# Altium PCB SmartCoin.PcbDoc
Units mm, origin at the board's own origin, x right, y up, seen from the top; angles counter-clockwise.
Board outline 28.59 x 29.14 mm, 4 copper layers (Top Layer 1, GND1, GND2, Bottom Layer 1), stack 1.586 mm thick; 38 components, 39 nets, 294 pads, 96 vias.
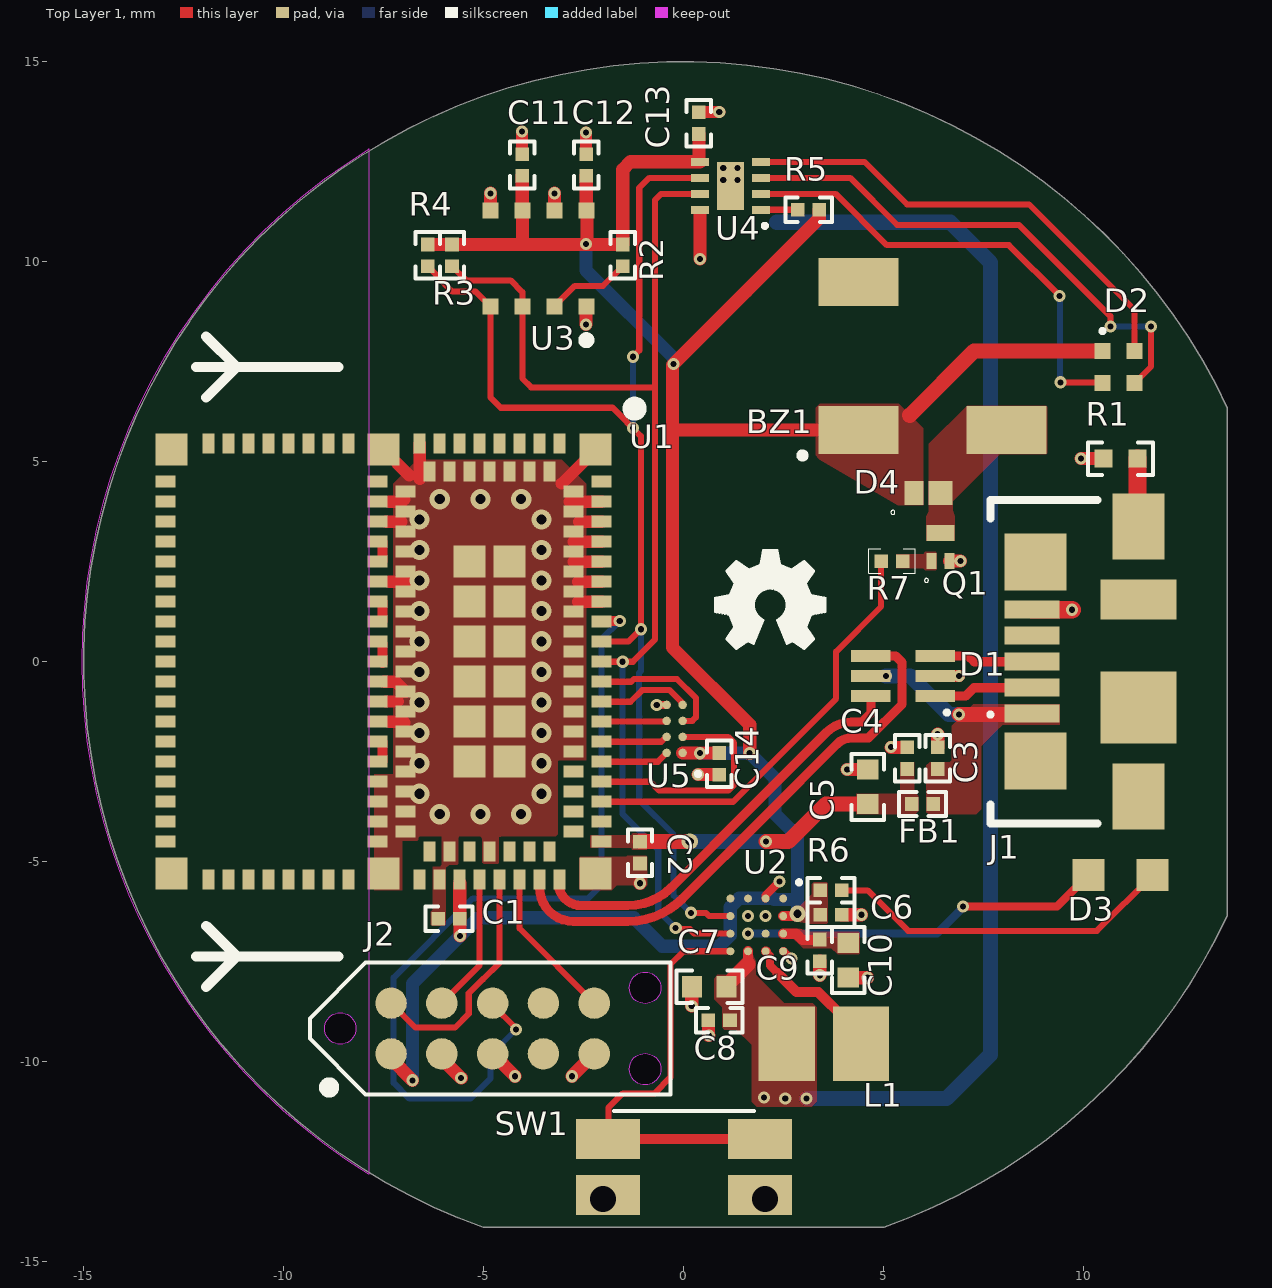
[diagram p0: Top Layer 1 view]
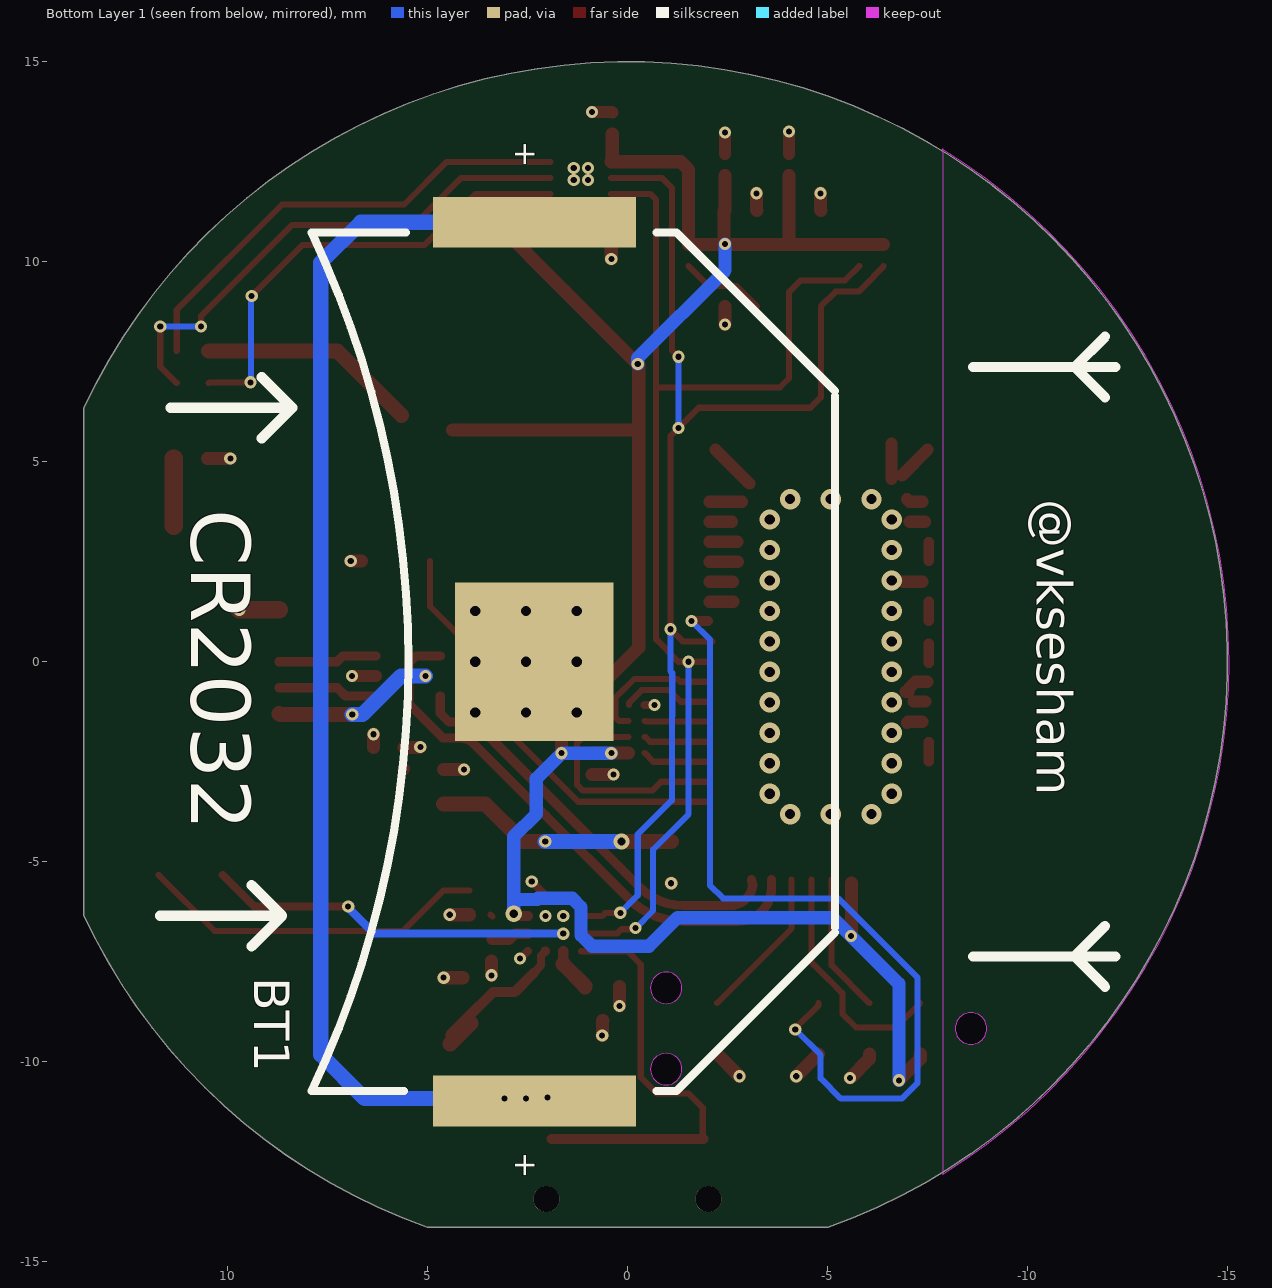
[diagram p1: Bottom Layer 1 view, seen from below]
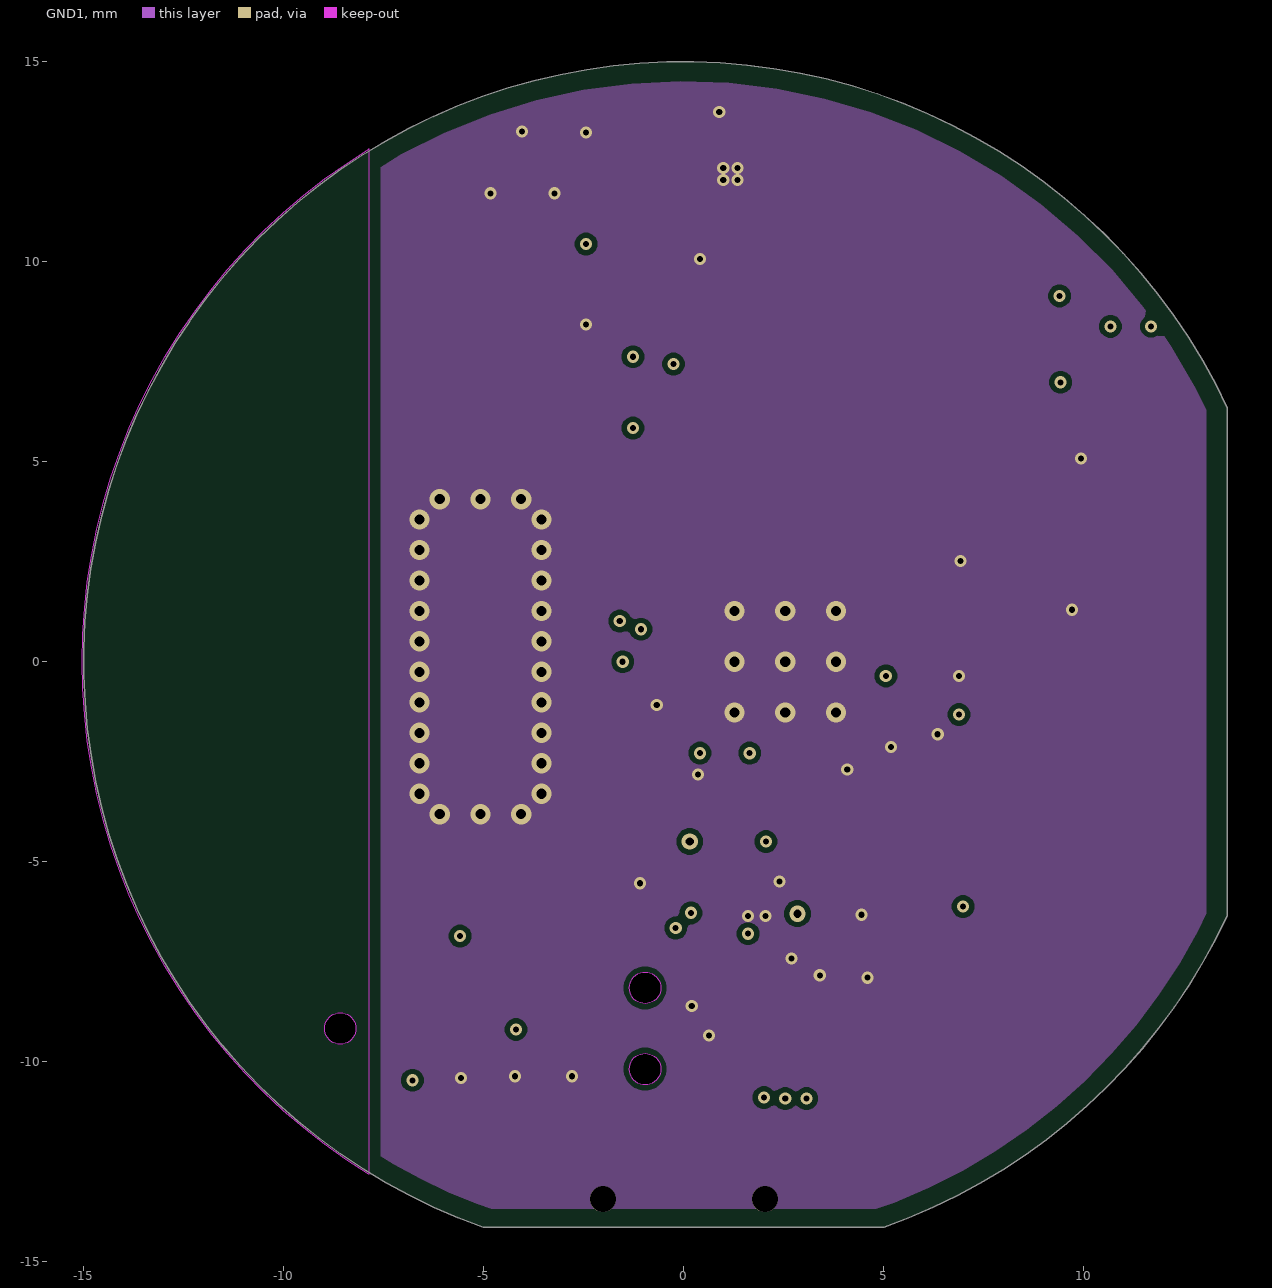
[diagram p2: GND1]
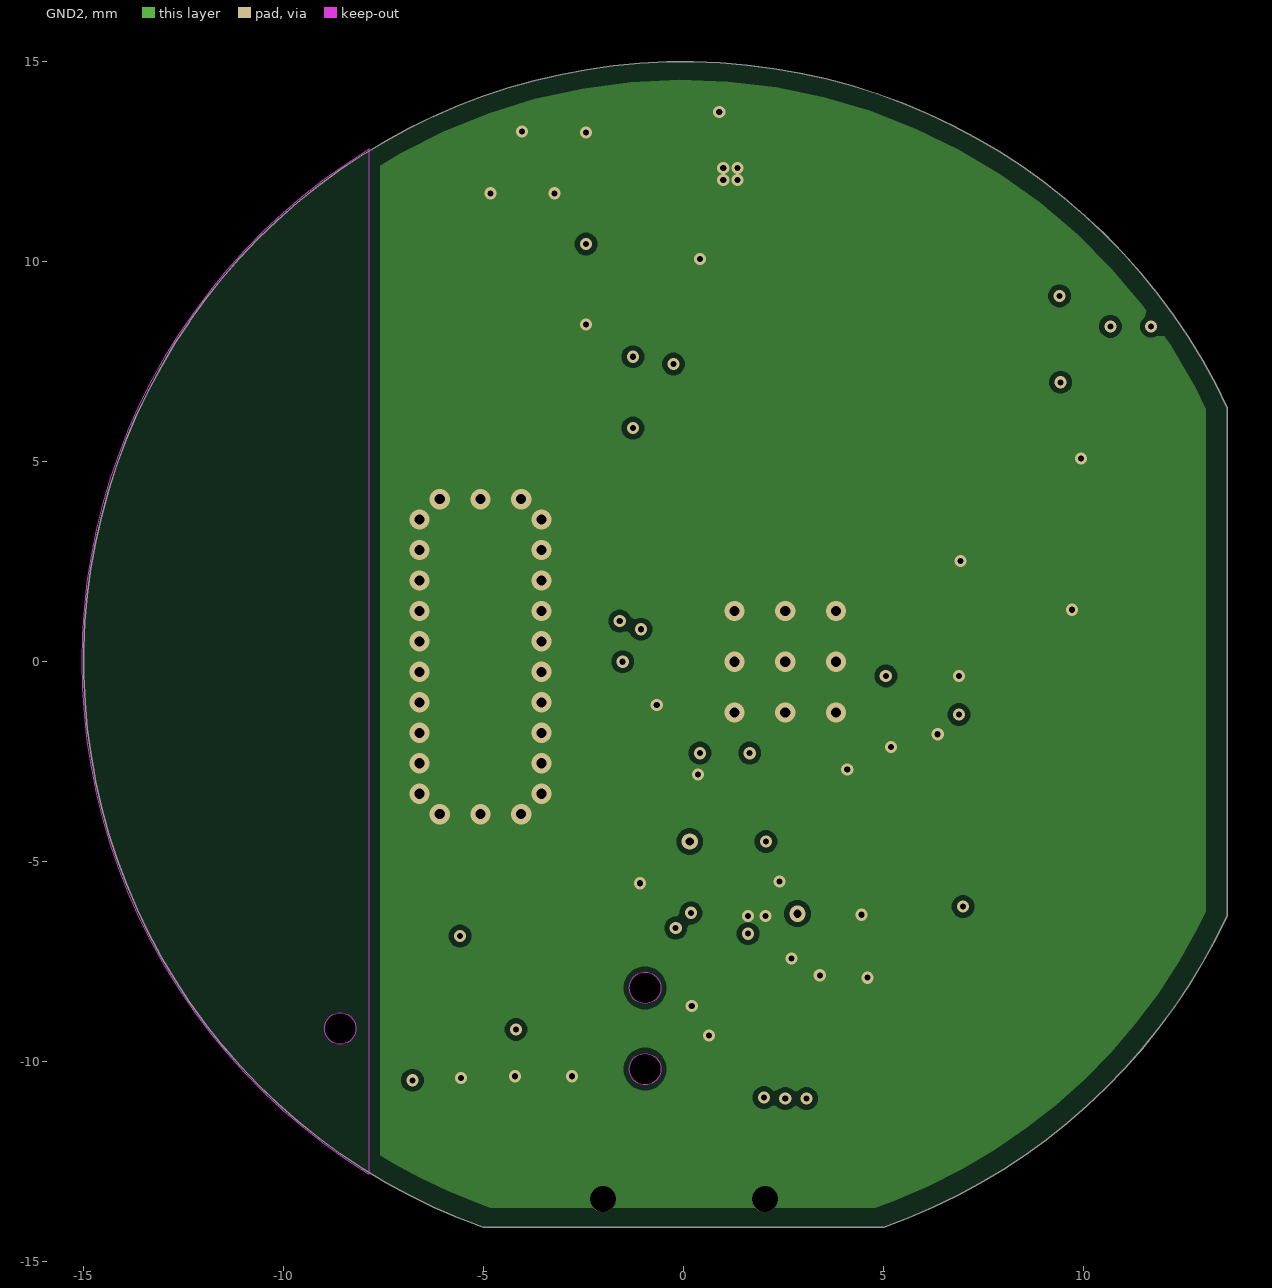
[diagram p3: GND2]
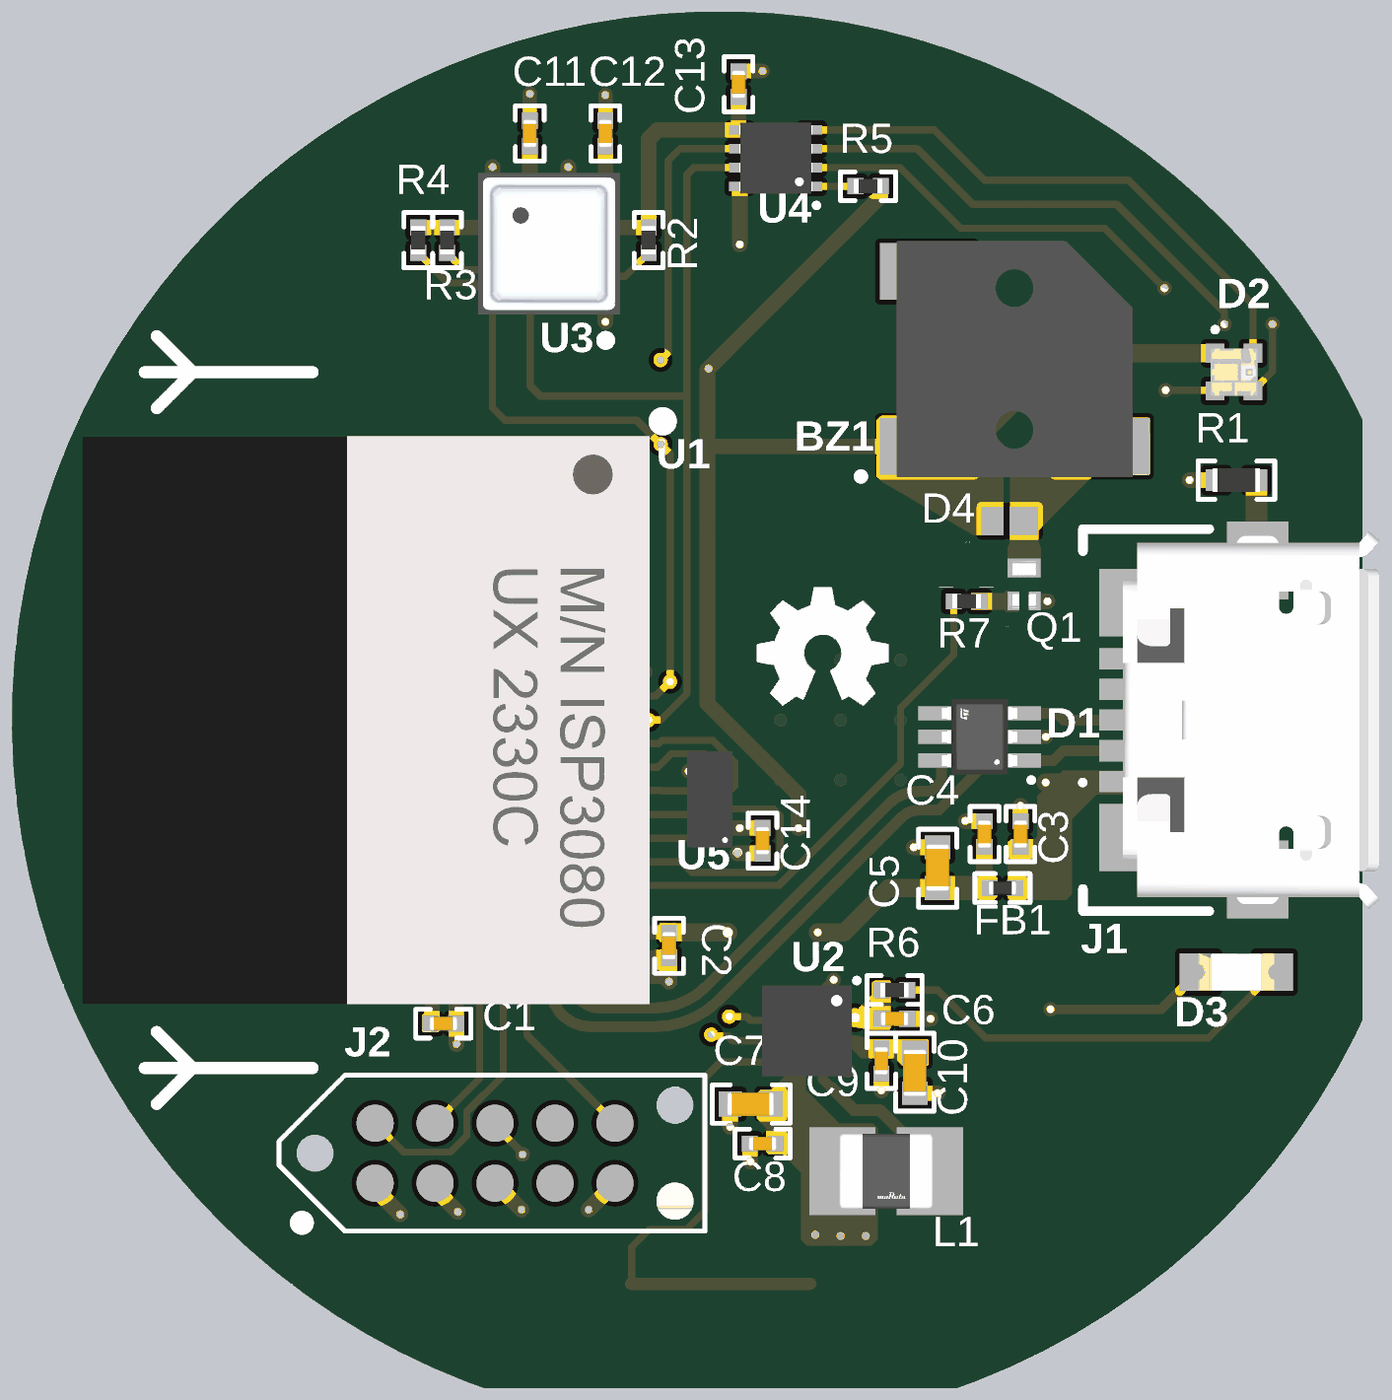
[diagram p4: 3D render of the assembled board from above, using the file's embedded part models]

## Layer stack, top to bottom
Top Solder: solder mask 0.0102, Solder Resist, Dk 3.5
Top Layer 1: signal copper 0.035
Dielectric 2: prepreg 0.2104, FR-4, Dk 4.4
GND1: signal copper 0.0152
Dielectric 1: dielectric 1.065, FR-4, Dk 4.6
GND2: signal copper 0.0152
Dielectric 3: prepreg 0.2104, FR-4, Dk 4.4
Bottom Layer 1: signal copper 0.035
Bottom Solder: solder mask 0.0102, Solder Resist, Dk 3.5

## Board outline
-5.01,-14.139 5.01,-14.139 ccw(c0,0) 13.595,-6.339 13.594,-6.339 13.594,6.339 13.595,6.339 ccw(c0,0)

## Design rules (kind name [scope] priority, off if disabled: settings)
Clearance Clearance_1 [All] p1: gap=0.127 ignorepadtopadclearanceinfootprint=FALSE
Clearance [(OnLayer('Keep-Out Layer')) vs HasFootprint('ISP3080-UX')] p2: gap=0 ignorepadtopadclearanceinfootprint=TRUE
ComponentClearance [All] p1: gap=0.254 collisioncheckmode=3 verticalgap=0.127 showdistances=FALSE
DiffPairsRouting [(InDifferentialPairClass('All Differential Pairs'))] p1: maxlimit=0.165 minlimit=0.165 mostfreqgap=0.165 toplayer_minwidth=0.23 toplayer_maxwidth=0.23 toplayer_prefwidth=0.23 midlayer1_minwidth=0.381 midlayer1_maxwidth=0.381 midlayer1_prefwidth=0.381 midlayer2_minwidth=0.381 midlayer2_maxwidth=0.381 midlayer2_prefwidth=0.381 bottomlayer_minwidth=0.23 bottomlayer_maxwidth=0.23 bottomlayer_prefwidth=0.23 impedanceprofiledriven=TRUE maxuncoupledlength=12.7
HoleSize [All] p1: absolutevalues=TRUE maxlimit=2.54 minlimit=0.152 maxpercent=80.000 minpercent=20.000
HoleToHoleClearance [All] p1: gap=0.152 allowstackedmicrovias=TRUE
MinimumSolderMaskSliver [HasFootprint('ISP3080-UX')] p1: minsoldermaskwidth=0
PolygonConnect [All] p1: connectstyle=Direct reliefconductorwidth=0.254 reliefentries=4 polygonreliefangle="90 Angle" airgapwidth=0.254
RoutingVias [All] p1: holewidth=0.254 width=0.508 viastyle="Through Hole" minholewidth=0.152 minwidth=0.305 maxholewidth=0.508 maxwidth=1.016
SilkToSilkClearance [All] p1: silktosilkclearance=0.15
SilkToSolderMaskClearance [IsPad] p1: minsilkscreentomaskgap=0.051 clearancetoexposedcopper=TRUE
SolderMaskExpansion [All] p1: expansion=0.102 istentingtop=FALSE
SupplyNets "Schematic Supply Nets_3" [InNet('3V')] p1: voltage=0.000
SupplyNets "Schematic Supply Nets_2" [InNet('VBUS')] p2: voltage=0.000
SupplyNets "Schematic Supply Nets" [InNet('GND')] p3: voltage=0.000
ViasUnderSMD [InBGA] p1: allowed=TRUE
Width [All] p1: maxlimit=0.508 minlimit=0.127 preferedwidth=0.152
23 further rules are at their usual default settings.

## Classes and differential pairs
component class Power: BT1 C6 C7 C8 C9 C10 D3 L1 R6 SW1 U2
component class MCU: C1 C2 U1
component class Peripherals: BZ1 C11 C12 C13 C14 D2 D4 Q1 R2 R3 R4 R5 R7 U3 U4 U5
component class Connectors: C3 C4 C5 D1 FB1 J1 J2 R1
differential pair USBD: +USBD_P -USBD_N
differential pair D: +D_P -D_N

## Components (designator, comment, footprint, x,y, rotation, side; value= is the part's Value field where it differs from the comment)
BT1 "3034" FP-3034-MFG 3,0 r90 bottom
BZ1 "Buzzer - CMT-0503-03-SMT-TR" "Buzzer - CMT-0503-03-SMT-TR" 6.223,7.645 r0 top locked
C1 "1uF" "Capacitor - 0201" -5.867,-6.426 r0 top
C2 "2u2F" "Capacitor - 0201" -1.092,-4.775 r90 top
C3 "1uF" "Capacitor - 0201" 6.35,-2.413 r270 top
C4 "1uF" "Capacitor - 0201" 5.588,-2.413 r270 top
C5 "10uF" "Capacitor - 0402" 4.597,-3.124 r270 top
C6 "2u2F" "Capacitor - 0201" 3.683,-6.325 r180 top
C7 "10uF" "Capacitor - 0402" 0.635,-8.128 r0 top
C8 "1nF" "Capacitor - 0201" 0.889,-8.966 r0 top
C9 "1nF" "Capacitor - 0201" 3.404,-7.214 r90 top
C10 "22uF" "Capacitor - 0402" 4.115,-7.468 r90 top
C11 "100nF" "Capacitor - 0201" -4.039,12.421 r270 top
C12 "100nF" "Capacitor - 0201" -2.438,12.421 r270 top
C13 "2u2F" "Capacitor - 0201" 0.381,13.462 r270 top
C14 "1uF" "Capacitor - 0201" 0.889,-2.553 r90 top
D1 "USBLC6-2P6" FP-SOT-666-MFG 5.486,-0.356 r180 top
D2 "150044M155260" WL-SFCC_0404_150044M155260 10.871,7.366 r270 top
D3 "150060VS75000" WL-SMCW_0603_150060xx75000 10.922,-5.334 r0 top
D4 "NSR05F40NXT5G" ONSC-DSN-2-152AC-01_V 6.121,4.216 r90 top
FB1 "BLM03AX100SZ1D" "Ferrite Beat - 0201" 5.969,-3.556 r180 top
J1 "473460001" FP-473460001-MFG 11.022,0 r90 top locked
J2 "TC2050-IDC" TC2050-IDC -4.775,-9.169 r0 top
L1 "LQM2MPN2R2MG0L" FP-LQM2MPN_G0-IPC_A 3.505,-9.55 r0 top
Q1 "DMN2300UFB4-7B" FP-X2-DFN1006-3-MFG 6.426,2.87 r90 top
R1 "0" "Resistor - 0402" 10.922,5.08 r0 top
R2 "1K" "Resistor - 0201" -1.524,10.16 r270 top
R3 "4.7K" "Resistor - 0201" -5.791,10.16 r90 top
R4 "4.7K" "Resistor - 0201" -6.401,10.16 r270 top
R5 "4.7K" "Resistor - 0201" 3.124,11.303 r180 top
R6 "100" "Resistor - 0201" 3.683,-5.715 r180 top
R7 "1K" "Resistor - 0201" 5.207,2.515 r0 top
SW1 "434331013822" 434331013822 1270.005,1257.315 r0 top
U1 "ISP3080-UX" ISP3080-UX -7.5,0 r270 top locked
U2 "nPM2100" npm2100 1.829,-6.579 r270 top locked
U3 "BME690" IC_BME688 -3.632,10.084 r270 top
U4 "KTD2026" KTD2026 1.168,11.897 r180 top
U5 "AT25EU0161A" AT25EU0161A -0.225,-1.68 r180 top locked

## Footprints (in the part's own frame and the unit in brackets; to place one, negate y for a bottom-side part, rotate by r counter-clockwise, add the part's x,y. Pads: shape width x height; smd on the part's side, far side on the other; paste and mask are expansions set on the pad)
434331013822 [mm] "WS-TASU 3.5x2.9 mm SMD side push"
  rect 1.6x1 smd: A1(-1271.9,-1269.25) A2(-1268.1,-1269.25) B1(-1271.9,-1270.65) B2(-1268.1,-1270.65)
  round 0.65 hole 0.65: B1(-1272.025,-1270.75) B2(-1267.975,-1270.75)
  silkscreen extent -1271.75,-1268.55 -1268.25,-1268.55, body extent -1272.35,-1272.1 -1267.65,-1268.55, height 1.35
AT25EU0161A [mm] "16-Mbit, Ultra-Low Energy Serial Flash Memory"
  round 0.21 smd: A1(-0.2,0.6) A2(0.2,0.6) B1(-0.2,0.2) B2(0.2,0.2) C1(-0.2,-0.2) C2(0.2,-0.2) D1(-0.2,-0.6) D2(0.2,-0.6)
  silkscreen extent -0.63,1.08 -0.54,1.17, body extent -0.48,-1.02 0.48,1.02, height 0.48
"Buzzer - CMT-0503-03-SMT-TR" [mm]
  rect 2x1.2 smd: 1(-1.85,-1.85) 2(1.85,-1.85) 3(-1.85,1.85)
  silkscreen extent -3.33,-2.57 -3.17,-2.41, body extent -2.5,-2.5 2.5,2.5, height 3.1
"Capacitor - 0201" [mm] "Chip Capacitor, 2-Leads, Body 0,60x0,30mm, IPC High Density"
  rect 0.34x0.34 smd: 1(-0.27,0) 2(0.27,0)
  silkscreen extent -0.58,-0.3 0.58,0.3, body extent -0.3,-0.15 0.3,0.15, height 0.3
"Capacitor - 0402" [mm] "Chip Capacitor, 2-Leads, Body 1,00x0,50mm, IPC High Density"
  rect 0.5x0.54 smd: 1(-0.43,0) 2(0.43,0)
  silkscreen extent -0.81,-0.41 0.84,0.41, body extent -0.5,-0.25 0.5,0.25, height 0.3
"Ferrite Beat - 0201" [mm] "Chip Inductor, 2-Leads, Body 0,60x0,30mm, IPC High Density"
  rect 0.34x0.34 smd: 1(-0.27,0) 2(0.27,0)
  silkscreen extent -0.58,-0.3 0.58,0.3, body extent -0.3,-0.15 0.3,0.15, height 0.3
FP-3034-MFG [mm]
  rect 3.96x3.96 smd paste-1000 mask+0: 1(0,-0.67)
  rect 1.27x5.08 smd paste+0 mask+0: 2(-10.985,-0.67) 2(10.985,-0.67)
  silkscreen extent -10.73,-8.19 10.73,4.9, body extent -11.62,-8.41 11.62,8.06, height 4.31
FP-473460001-MFG [mm]
  rect 0.45x1.38 smd paste+0 mask+0: 1(-1.3,2.31) 2(-0.65,2.31) 3(0,2.31) 4(0.65,2.31) 5(1.3,2.31)
  rect 1.425x1.55 smd paste+0 mask+0: 6(-2.488,2.225) 7(2.488,2.225)
  rect 1.65x1.3 smd paste+0 mask+0: 8(-3.375,-0.35) 11(3.375,-0.35)
  rect 1.8x1.9 smd paste+0 mask+0: 9(-1.15,-0.35)
  rect 1x1.9 smd paste+0 mask+0: 10(1.55,-0.35)
  silkscreen extent -4.05,0.67 4.05,3.41, body extent -4.3,-2.48 4.3,3.45, height 0.25
FP-LQM2MPN_G0-IPC_A [mm]
  rect 1.406x1.858 smd paste+0 mask+0: 1(-0.926,0) 2(0.926,0)
  body extent -2.13,-1.43 2.13,1.43, height 0.25
FP-SOT-666-MFG [mm]
  rect 0.99x0.3 smd paste+0 mask+0: 1(-0.805,0.5) 2(-0.805,0) 3(-0.805,-0.5) 4(0.805,-0.5) 5(0.805,0) 6(0.805,0.5)
  silkscreen extent -1.14,0.86 -1.04,0.97, body extent -1.4,-0.95 1.4,0.95, height 0.25
FP-X2-DFN1006-3-MFG [mm]
  rect 0.4x0.25 smd paste+0 mask+0: 1(-0.35,0.225) 3(-0.35,-0.225)
  rect 0.4x0.7 smd paste+0 mask+0: 2(0.35,0)
  silkscreen extent -0.89,0.3 -0.79,0.41, body extent -0.65,-0.45 0.65,0.45, height 0.25
IC_BME688 [mm]
  rect 0.4x0.4 smd: 1(1.2,1.2) 2(1.2,0.4) 3(1.2,-0.4) 4(1.2,-1.2) 5(-1.2,-1.2) 6(-1.2,-0.4) 7(-1.2,0.4) 8(-1.2,1.2)
  silkscreen extent 1.95,1.1 2.14,1.3, body extent -1.5,-1.5 1.5,1.5, height 1
ISP3080-UX [mm] "ISP3080-UX module footprint"
  rect 0.8x0.8 smd mask+0.05: 1(-5.3,5.3) 17(-5.3,0) 55(5.3,0) 71(5.3,5.3) 109(2.5,3.15) 110(1.5,3.15) 111(0.5,3.15) 112(-0.5,3.15) 113(-1.5,3.15) 114(-2.5,3.15) 115(2.5,2.15) 116(1.5,2.15) 117(0.5,2.15) 118(-0.5,2.15) 119(-1.5,2.15) 120(-2.5,2.15) 129(-5.3,-5.3) 149(5.3,-5.3)
  rect 0.5x0.3 smd mask+0.05: 2(-5.45,4.4) 3(-4.75,4.15) 4(-5.45,3.9) 5(-4.75,3.65) 6(-5.45,3.4) 7(-4.75,3.15) 8(-5.45,2.9) 9(-4.75,2.65) 10(-5.45,2.4) 11(-4.75,2.15) 12(-5.45,1.9) 13(-4.75,1.65) 14(-5.45,1.4) 15(-4.75,1.15) 16(-5.45,0.9) 56(5.45,0.9) 57(4.75,1.15) 58(5.45,1.4) 59(4.75,1.65) 60(5.45,1.9) 61(4.75,2.15) 62(5.45,2.4) 63(4.75,2.65) 64(5.45,2.9) 65(4.75,3.15) 66(5.45,3.4) 67(4.75,3.65) 68(5.45,3.9) 69(4.75,4.15) 70(5.45,4.4) 121(-5.45,-0.875) 122(-5.45,-1.375) 123(-5.45,-1.875) 124(-5.45,-2.375) 125(-5.45,-2.875) 126(-5.45,-3.375) 127(-5.45,-3.875) 128(-5.45,-4.375) 150(5.45,-4.375) 151(5.45,-3.875) 152(5.45,-3.375) 153(5.45,-2.875) 154(5.45,-2.375) 155(5.45,-1.875) 156(5.45,-1.375) 157(5.45,-0.875)
  rect 0.3x0.5 smd mask+0.05: 18(-4.5,-0.15) 19(-4.25,0.55) 20(-4,-0.15) 21(-3.75,0.55) 22(-3.5,-0.15) 23(-3.25,0.55) 24(-3,-0.15) 25(-2.75,0.55) 26(-2.5,-0.15) 27(-2.25,0.55) 28(-2,-0.15) 29(-1.75,0.55) 30(-1.5,-0.15) 31(-1.25,0.55) 32(-1,-0.15) 33(-0.75,0.55) 34(-0.5,-0.15) 35(-0.25,0.55) 36(0,-0.15) 37(0.25,0.55) 38(0.5,-0.15) 39(0.75,0.55) 40(1,-0.15) 41(1.25,0.55) 42(1.5,-0.15) 43(1.75,0.55) 44(2,-0.15) 45(2.25,0.55) 46(2.5,-0.15) 47(2.75,0.55) 48(3,-0.15) 49(3.25,0.55) 50(3.5,-0.15) 51(3.75,0.55) 52(4,-0.15) 53(4.25,0.55) 54(4.5,-0.15) 72(4.5,5.45) 73(4.25,4.75) 74(4,5.45) 75(3.75,4.75) 76(3.5,5.45) 77(3.25,4.75) 78(3,5.45) 79(2.75,4.75) 80(2.5,5.45) 81(2.25,4.75) 82(2,5.45) 83(1.75,4.75) 84(1.5,5.45) 85(1.25,4.75) 86(1,5.45) 87(0.75,4.75) 88(0.5,5.45) 89(0.25,4.75) 90(0,5.45) 91(-0.25,4.75) 92(-0.5,5.45) 93(-0.75,4.75) 94(-1,5.45) 95(-1.25,4.75) 96(-1.5,5.45) 97(-1.75,4.75) 98(-2,5.45) 99(-2.25,4.75) 100(-2.5,5.45) 101(-2.75,4.75) 102(-3,5.45) 103(-3.25,4.75) 104(-3.5,5.45) 105(-3.75,4.75) 106(-4,5.45) 107(-4.25,4.75) 108(-4.5,5.45) 130(-4.5,-5.45) 131(-4,-5.45) 132(-3.5,-5.45) 133(-3,-5.45) 134(-2.5,-5.45) 135(-2,-5.45) 136(-1.5,-5.45) 137(-1,-5.45) 138(-0.5,-5.45) 139(0,-5.45) 140(0.5,-5.45) 141(1,-5.45) 142(1.5,-5.45) 143(2,-5.45) 144(2.5,-5.45) 145(3,-5.45) 146(3.5,-5.45) 147(4,-5.45) 148(4.5,-5.45)
  silkscreen extent -6.37,6.23 -6.28,6.32, body extent -6.01,-6.01 6.01,6, height 1.53
KTD2026 [mm] "3-CHANNEL Rgb Led Driver With I2C"
  rect 0.45x0.2 smd: 1(-0.76,0.6) 2(-0.76,0.2) 3(-0.76,-0.2) 4(-0.76,-0.6) 5(0.76,-0.6) 6(0.76,-0.2) 7(0.76,0.2) 8(0.76,0.6)
  rect 0.67x1.2 smd: 9(0,0)
  silkscreen extent -0.91,0.95 -0.81,1.05, body extent -0.77,-0.75 0.77,0.75, height 0.55
npm2100 [mm] "Power Management IC (PMIC)"
  round 0.2 smd: A1(-0.66,0.66) A2(-0.22,0.66) A3(0.22,0.66) A4(0.66,0.66) B1(-0.66,0.22) B2(-0.22,0.22) B3(0.22,0.22) B4(0.66,0.22) C1(-0.66,-0.22) C2(-0.22,-0.22) C3(0.22,-0.22) C4(0.66,-0.22) D1(-0.66,-0.66) D2(-0.22,-0.66) D3(0.22,-0.66) D4(0.66,-0.66)
  silkscreen extent -1.12,1 -1.01,1.11, body extent -0.96,-0.95 0.96,0.95, height 0.52
ONSC-DSN-2-152AC-01_V [mm] "DSN, 2-Leads, Body 1x0.6mm"
  rect 0.6x0.47 smd: 1(0,0.365)
  rect 0.6x0.6 smd: 2(0,-0.3)
  silkscreen extent -0.53,0.84 -0.43,0.94, body extent -0.3,-0.5 0.3,0.5, height 0.31
"Resistor - 0201" [mm] "Chip Resistor, 2-Leads, Body 0,60x0,30mm, IPC High Density"
  rect 0.34x0.34 smd: 1(-0.27,0) 2(0.27,0)
  silkscreen extent -0.58,-0.3 0.58,0.3, body extent -0.3,-0.15 0.3,0.15, height 0.3
"Resistor - 0402" [mm] "Chip Resistor, 2-Leads, Body 1,00x0,50mm, IPC High Density"
  rect 0.45x0.45 smd: 1(-0.425,0) 2(0.425,0)
  silkscreen extent -0.81,-0.41 0.81,0.41, body extent -0.5,-0.25 0.5,0.25, height 0.3
TC2050-IDC [mm]
  round 0.787 smd: 1(-2.54,-0.635) 2(-1.27,-0.635) 3(0,-0.635) 4(1.27,-0.635) 5(2.54,-0.635) 6(2.54,0.635) 7(1.27,0.635) 8(0,0.635) 9(-1.27,0.635) 10(-2.54,0.635)
  Keep-Out Layer board cut-out: -3.81,-0.393 -3.961,-0.364 -4.088,-0.278 -4.174,-0.151 -4.203,0 -4.203,0 -4.174,0.151 -4.088,0.278 -3.961,0.364 -3.81,0.393 -3.81,0.393 -3.659,0.364 -3.532,0.278 -3.446,0.151 -3.417,0 -3.417,0 -3.446,-0.151 -3.532,-0.278 -3.659,-0.364 -3.81,-0.393
  Keep-Out Layer board cut-out: 3.417,1.015 3.446,1.166 3.532,1.293 3.659,1.379 3.81,1.408 3.81,1.408 3.961,1.379 4.088,1.293 4.174,1.166 4.203,1.015 4.203,1.015 4.174,0.864 4.088,0.737 3.961,0.651 3.81,0.621 3.81,0.621 3.659,0.651 3.532,0.737 3.446,0.864 3.417,1.015
  Keep-Out Layer board cut-out: 3.417,-1.015 3.446,-0.864 3.532,-0.737 3.659,-0.651 3.81,-0.621 3.81,-0.621 3.961,-0.651 4.088,-0.737 4.174,-0.864 4.203,-1.015 4.203,-1.015 4.174,-1.166 4.088,-1.293 3.961,-1.379 3.81,-1.408 3.81,-1.408 3.659,-1.379 3.532,-1.293 3.446,-1.166 3.417,-1.015
  silkscreen extent -4.57,-1.65 4.44,1.65
WL-SFCC_0404_150044M155260 [mm] "SMT Full-color Chip LED Compact, body 1.00 x 1.00mm"
  rect 0.4x0.4 smd: 1(-0.4,-0.4) 2(-0.4,0.4) 3(0.4,0.4) 4(0.4,-0.4)
  silkscreen extent -0.95,-0.45 -0.85,-0.35, body extent -0.5,-0.5 0.5,0.5, height 0.65
WL-SMCW_0603_150060xx75000 [mm] "SMD Mono-color Chip LED, body 1.60 x 0.80 mm"
  rect 0.8x0.8 smd: 1(-0.8,0) 2(0.8,0)
  body extent -0.8,-0.4 0.8,0.4, height 0.7

## Part data
BT1: library part CMP-19636-000006-1, "BATTERY RETAINER COIN 20MM SMD", Manufacturer="Keystone Electronics", Automotive=No, Category=Batt, ComponentLink2Description=Datasheet, ComponentLink2URL=https://www.keyelco.com/product-pdf.cfm?p=798, Contact Material=Nickel, Device Class L1=Connectors, Device Class L2=unset, Device Class L3=unset, Digikey Description="BATTERY RETAINER COIN 20MM SMD", Height=4.31mm, Lead Free=Yes, Manufacturer Part Number=3034, Mouser Description="Coin Cell Battery Holders COIN CELL RETAINER", Number of Contacts=2, Octopart=https://octopart.com/3034-keystone-27554462, Package=3034, RoHS=TRUE
BZ1: "MAGNETIC BUZZER TRANSDUCER"
C1 C2 C3 C4 C6 C8 C9 C11 C12 C13 C14: library part "Capacitor - 0201"
C5 C7 C10: library part "Capacitor - 0402"
D1: library part CMP-12225-000058-1, "TVS DIODE 5.25V 17V SOT666", Breakdown Voltage=6V, Capacitance=3.5pF, Case/Package=SOT-666, Clamping Voltage=17V, Leakage Current=150nA, Max Operating Temperature=125°C, Min Operating Temperature=-40°C, Operating Supply Voltage=5V, Package Quantity=1, Peak Pulse Current=5A, Power Line Protection=Yes, Test Current=1mA, Contact Plating=Tin, Depth=1.3mm, Direction=Unidirectional, Element Configuration=Dual, ESD Protection=Yes, Height=0.6mm, Lead Free="Lead Free", Length=1.7mm, Max Breakdown Voltage=6V, Max Reverse Leakage Current=150nA, Min Breakdown Voltage=6V, Mount="Surface Mount", Number of Bidirectional Channels=2, Number of Channels=2, Number of Elements=1, Number of Pins=6, Packaging="Tape and Reel", Polarity=Unidirectional, Radiation Hardening=No, REACH SVHC="No SVHC", Reverse Breakdown Voltage=6V, Reverse Standoff Voltage=5V, Termination=SMD/SMT, Width=1.3mm, Working Voltage=5V
D2: library part CMP-03913-98750578-1, "150044M155260 WL-SFCC SMT Full-color Chip LED compact", Case/Package=0404, Color="Blue, Green, Red", Forward Current=30mA, Forward Voltage=2V, Max Operating Temperature=85°C, Max Reverse Voltage (DC)=5V, Min Operating Temperature=-40°C, Power Dissipation=24mW, Dominant Wavelength=530nm, Height=650µm, Length=1mm, Luminous Intensity=50mcd, NexarPartId=98750578, Peak Wavelength=465nm, Reverse Voltage=5V, RoHS=Compliant, Viewing Angle=140°, Width=1mm
D3: library part CMP-1426-00006-7, "WURTH ELEKTRONIK - 150060VS75000 - LED, Green, SMD, 0603, 30 mA, 2 V, 570 nm", Case Code (Imperial)=0603, Case Code (Metric)=1608, Color=Green, Forward Current=100mA, Forward Voltage=2V, Max Junction Temperature (Tj)=95°C, Max Operating Temperature=85°C, Max Reverse Voltage (DC)=5V, Min Operating Temperature=-40°C, Power Dissipation=72mW, Test Current=20mA, Case/Package=0603, Dominant Wavelength=570nm, Height=700µm, Length=1.6mm, Lens Style="Clear, Rectangular", Luminous Intensity=40mcd, Mount="Surface Mount", Number of Pins=2, Packaging="Tape and Reel", Peak Wavelength=572nm, REACH SVHC=Unknown, Reverse Voltage=5V, RoHS=Compliant, Viewing Angle=140°, Wavelength=570nm, Width=800µm
D4: library part CMP-1055-00232-1, "Schottky Barrier Diode, 2-Pin DSN, Pb-Free, Tape and Reel", Manufacturer="On Semiconductor", ComponentLink1Description="Manufacturer URL", ComponentLink1URL=http://www.onsemi.com/, ComponentLink2Description=Datasheet, ComponentLink2URL=http://www.onsemi.cn/pub_link/Collateral/NSR05F40.PDF, ComponentLink3Description="Package Specification", ComponentLink3URL=http://www.onsemi.cn/pub_link/Collateral/152AC.PDF, Configuration=Single, DatasheetVersion="Rev. 3", IFSM Max (A)=10, Mounting Technology="Surface Mount", PackageDescription="2-Pin Micro Molded Package, Body 1 x 0.6 mm", PackageReference=DSN-2-152AC-01, PackageVersion="Rev. C, 01/2011", Packing="Tape and Reel", PartNumber=NSR05F40NXT5G, RoHS=TRUE
FB1: library part "Ferrite Bead - 0201", Supplier Part Number 1=445-MPZ1608S601ATD25CT-ND, Supplier 1=Digikey
J1: library part CMP-2000-05246-2, "CONN RCPT USB2.0 MICRO B SMD R/A", Current Rating=1.8A, Manufacturer=Molex, Package=0, Temperature="-30°C to +85°C", Temperature Range High=+85°C, Temperature Range Low=-30°C, Voltage Rating=30V, Automotive=No, Category=Conn, ComponentLink2Description=Datasheet, ComponentLink2URL=https://www.molex.com/webdocs/datasheets/pdf/en-us/0473460001_IO_CONNECTORS.pdf, Conn Orientation="Right Angle", Contact Material=Gold,Nickel, Device Class L1=Connectors, Device Class L2="USB Connectors", Device Class L3=unset, Digikey Description="CONN RCPT USB2.0 MICRO B SMD R/A", Footprint Url=https://www.molex.com/pdm_docs/sd/473460001_sd.pdf, Height=2.945mm, Is Female=yes, Lead Free=Yes, Manufacturer Part Number=473460001, Number of Contacts=5, Octopart=https://octopart.com/47346-0001-molex-7164928, Pitch=0.65mm, RoHS=TRUE, Shielding=true, USB Standard="USB 2.0"
L1: library part CMP-06042-008995-1, "Multilayer Type Inductor for Power Lines, 0806 (2016), 2.2μH, 20%, 0.138Ω, 1.2A", Case Code (Imperial)=0805, Case Code (Metric)=2012, Current Rating=1.2A, DC Resistance (DCR)=138mR, Inductance=2.2uH, Max Operating Temperature=125°C, Min Operating Temperature=-55°C, Package Quantity=3000, Self Resonant Frequency=40MHz, Test Frequency=1MHz, Tolerance=20%, Case/Package=0805, Core Material=Ferrite, Height=0.9mm, Height - Seated (Max)=0.039inch, Length=0.079inch, Max DC Current=1.2A, Mount="Surface Mount", Packaging="Tape and Reel", Shielding=Shielded, Termination=SMD/SMT, Weight=0.000353oz, Width=0.049inch
Q1: library part CMP-12801-000056-1, "MOSFET N-CH 20V 1.3A 3DFN", Continuous Drain Current=1.3A, Drain To Source Breakdown Voltage=20V, Drain To Source Resistance=175mΩ, Gate To Source Voltage=8V, Input Capacitace At Vds="67.6pF @ 20V", Manufacturer="Diodes Inc.", Max Forward Diode Voltage=1.2V, Max Junction Temp=+150°C, Package=X2-DFN1006-3, Power Dissipation=500mW, Pulse Drain Current=6A, Temperature="-55°C to +150°C", Temperature Range Low=-55°C, Typ Forward Diode Voltage=0.7V, Automotive=No, Category=Trans, ComponentLink2Description=Datasheet, ComponentLink2URL=https://www.diodes.com/assets/Datasheets/DMN2300UFB4.pdf, Depletion Mode=False, Device Class L1="Discrete Semiconductors", Device Class L2=Transistors, Device Class L3=MOSFETs, Digikey Description="MOSFET N-CH 20V 1.3A 3DFN", Drain To Source Voltage=20V, Footprint Url=https://www.diodes.com/assets/Package-Files/X2-DFN1006-3.pdf, Gate Charge At Vgs="1.6nC @ 4.5V", Height=0.4mm, Lead Free=Yes, Manufacturer Part Number=DMN2300UFB4-7B, Mouser Description="MOSFET 20V N-Ch ENH Mode 175mOhm 4.5V 1.30A", Number of Channels=1, Number Of N Channels=1, Octopart=https://octopart.com/dmn2300ufb4-7b-diodes+inc.-21789371, RoHS=TRUE, Rthja Max=250°C/W, Standoff Height=0mm, Temperature Range High=+150°C, Threshold Vgs Max=0.95V, Threshold Vgs Min=0.45V, Turn Off Delay Time=38ns, Turn On Delay Time=3.5ns
R1: library part "Resistor - 0402"
R2 R3 R4 R5 R6 R7: library part "Resistor - 0201"
SW1: library part CMP-03913-71472419-1, "434331013822 Tactile Switch, 0.05A, 12Vdc, 220Gf, Smd Rohs Compliant: Yes", Current Rating=50mA, Insulation Resistance=100MΩ, Max Operating Temperature=85°C, Min Operating Temperature=-40°C, Voltage Rating=12V, Actuator Material="Nylon, Polyamide", Contact Material=Steel, Contact Plating=Silver, Height=1.35mm, Illumination Type=Non-Illuminated, Mechanical Life=100kcycles, Mount="Surface Mount", NexarPartId=71472419, Packaging="Tape and Reel", RoHS=Compliant, Switch Function=Off-Mom, Switch Travel=200µm, Termination=SMD/SMT, Throw Configuration=SPST
U1: library part CMP-006-000000-2, "BLE & UWB module (Revision C)", Design Item ID=ISP3080-UX, Source=ISP3080C.SchLib
U3: library part CMP-008-000000-2, "Gas sensor measuring relative humidity, barometric pressure, ambient temperature and gas (VOC)", Package=None, Availability=Unavailable, Component Type=Standard, ComponentLink1Description="New link", ComponentLink1URL=https://www.mouser.de/ProductDetail/Bosch-Sensortec/BME690?qs=%252BXxaIXUDbq38jwlEAGDF7A%3D%3D&mgh=1&vip=1&utm_id=20979042634&utm_source=google&utm_medium=cpc&utm_marketing_tactic=emeacorp&gad_source=1&gbraid=0AAAAADn_wf2GV-P32WQOtb6QF-9Q6urY0&gclid=CjwKCAjwn6LABhBSEiwAsNJrjqYGezIL6UTP-OEPoU9ondhUKEEh1LMLQiGljPd-_uXlPKwCiylmnRoC0IEQAvD_BwE, Design Item ID=BME688, MP=BME688, Pin Count=8, Price=None, Source=BME688.SchLib
U4: "3-CHANNEL Rgb Led Driver With I2C"
U5: "16-Mbit, Ultra-Low Energy Serial Flash Memory"

## Via types
v1: diameter 0.305, hole 0.152, Top Layer 1 to Bottom Layer 1, tented both sides, 50 vias
v2: diameter 0.508, hole 0.254, Top Layer 1 to Bottom Layer 1, tented both sides, 26 vias
v3: diameter 0.305, hole 0.152, Top Layer 1 to Bottom Layer 1, 9 vias
v4: diameter 0.508, hole 0.254, GND1 to Bottom Layer 1, 9 vias
v5: diameter 0.406, hole 0.203, Top Layer 1 to Bottom Layer 1, tented both sides, 1 vias
v6: diameter 0.406, hole 0.203, Top Layer 1 to Bottom Layer 1, 1 vias

## Nets (pads, with @x,y where several pads share a name; then routed paths per layer and width w, separated by ;. In a path a pad name is that pad's centre, name@x,y a point inside that pad or via, vN(x,y) a via of type N, cw(c..) or ccw(c..) an arc to the next point about the centre after c; other vN are vias at no path point)
3V: BZ1.1 C1.2 C6.2 C11.2 C12.2 C13.2 C14.2 D2.1 D4.1 J2.1 R2.1 R3.2 R4.1 R5.1 R6.2 U1.60 U2.A2 U3.6 U3.8 U4.5 U5.A1 | length 66.1
  Top Layer 1 w0.152: C6.2@3.373,-6.374 C6.2@3.422,-6.325
  Top Layer 1 w0.254: U2.A2 v6@2.785,-6.359
  Top Layer 1 w0.33: J2.1 -7.315,-9.926 -6.782,-10.459 v1(-6.782,-10.465) ; R4.1 R3.2 -4.064,10.43 ; C1.2@-5.599,-6.425 U1.60@-5.599,-5.535 ; C1.2 -5.593,-6.431 -5.593,-6.853 v1(-5.588,-6.858) ; C11.2 -4.035,12.147 -4.035,11.287 U3.6 -4.032,10.462 -4.064,10.43 ; C12.2 -2.435,12.147 -2.435,11.287 U3.8 -2.413,11.265 v1@-2.413,10.43 ; U5.A1 -0.022,-2.283 0.403,-2.283 v1(0.406,-2.286) 0.41,-2.283 C14.2 ; C13.2 0.381,12.524 U4.5 -1.331,12.497 -1.524,12.303 R2.1 v1@-2.413,10.43 ; 1.567,9.264 -0.279,7.417 -0.279,5.766 ; 1.568,9.264 3.389,11.085 3.389,11.298 R5.1 ; v1(1.651,-2.286) 1.651,-1.575 -0.279,0.356 -0.279,5.766 ; BZ1.1 -0.25,5.795 -0.279,5.766 ; -4.064,10.43 v1@-2.413,10.43
  Top Layer 1 w0.381: 5.653,6.161 7.258,7.766 D2.1
  Bottom Layer 1 w0.33: v1(-6.782,-10.465) -6.782,-8.052 -5.131,-6.401 -1.245,-6.401 -0.533,-7.112 0.889,-7.112 1.165,-6.836 1.165,-6.135 1.386,-5.914 2.233,-5.914 2.261,-5.942 2.845,-5.942 ; v1(-2.438,10.439) -2.438,9.779 -0.254,7.595 v1(-0.254,7.442) ; v1(0.406,-2.286) v1(1.651,-2.286) 2.286,-2.921 2.286,-3.81 2.845,-4.369 2.845,-5.942 ; v6(2.845,-6.299) 2.845,-5.942
BZR: R7.1 U1.76 | length 10.8
  Top Layer 1 w0.152: U1.76 1.234,-3.5 3.81,-0.924 3.81,0.254 4.937,1.381 R7.1
D_N: D1.6 U1.70 | length 10.5
  Top Layer 1 w0.23: U1.70 -3.128,-5.585 ccw(c-2.899,-5.565) -3.128,-5.59 ccw(c-2.561,-5.526) -2.561,-6.096 -2.489,-6.096 -1.397,-6.096 ccw(c-1.397,-4.563) -0.313,-5.647 1.765,-3.569 3.564,-1.77 cw(c4.191,-2.396) 4.191,-1.51 4.456,-1.51 4.681,-1.284 D1.6
D_P: D1.4 U1.68 | length 13.8
  Top Layer 1 w0.23: U1.68 -3.6,-5.646 ccw(c-2.755,-5.646) -2.755,-6.491 -1.397,-6.491 ccw(c-1.397,-4.563) -0.034,-5.927 ; -0.034,-5.926 2.045,-3.848 3.844,-2.049 cw(c4.191,-2.396) 4.191,-1.905 4.619,-1.905 5.461,-1.063 5.461,-0.018 5.298,0.144 D1.4
GND: BT1.1 C1.1 C2.1 C3.1 C4.1 C5.1 C6.1 C7.1 C8.1 C9.1 C10.1 C11.1 C12.1 C13.1 C14.1 D1.2 J1.5 J2.2 J2.3 J2.5 Q1.3 R1.1 SW1.B1 SW1.B2 U1.1 U1.3 U1.5 U1.7 U1.9 U1.11 U1.13 U1.15 U1.16 U1.17 U1.19 U1.20 U1.21 U1.22 U1.23 U1.25 U1.27 U1.28 U1.29 U1.31 U1.33 U1.35 U1.37 U1.38 U1.39 U1.40 U1.41 U1.42 U1.43 U1.45 U1.47 U1.48 U1.49 U1.50 U1.51 U1.52 U1.53 U1.54 U1.55 U1.58 U1.59 U1.63 U1.71 U1.81 U1.83 U1.85 U1.87 U1.89 U1.91 U1.93 U1.95 U1.96 U1.97 U1.98 U1.99 U1.100 U1.101 U1.102 U1.103 U1.104 U1.105 U1.106 U1.107 U1.109 U1.110 U1.111 U1.112 U1.113 U1.114 U1.115 U1.116 U1.117 U1.118 U1.119 U1.120 U2.A4 U2.B1 U2.B2 U2.C2 U3.1 U3.5 U3.7 U4.8 U4.9 U5.D2 | length 23.5
  Top Layer 1 w0.203: v1(-0.672,-1.081) -0.427,-1.081 U5.D2 ; U2.B1 2.049,-5.843 v1(2.395,-5.497) ; U2.A4 2.502,-7.239 2.68,-7.417 v1(2.692,-7.417)
  Top Layer 1 w0.292: D1.2 v1(6.886,-0.356)
  Top Layer 1 w0.305: U1.17 -6.858,4.658 ; U1.38@-7.493,-0.5 -7.2,-0.5 -7.021,-0.679 -7.021,-0.748 -7.019,-0.75 U1.39 ; U1.40@-7.442,-0.996 -7.149,-0.996 ; U1.22@-7.437,3.5 -7.056,3.5 ; -7.366,-1.5 -7.009,-1.5 -6.985,-1.524 ; -7.366,2 -6.89,2 ; -7.366,4 -7.049,4 -6.985,4.064 ; -6.6,4.576 U1.16 ; C11.1 v1(-4.039,13.259) ; -3.048,4.452 U1.1 ; -2.857,4 U1.106 ; -2.754,2.5 U1.100 ; -2.746,3 U1.102 ; -2.643,1.5 U1.96 ; -2.635,2 U1.98 ; -2.611,3.5 U1.104 ; C12.1 v1(-2.438,13.233) ; C13.1 0.39,13.741 v1(0.889,13.741)
  Top Layer 1 w0.33: J2.2 -6.045,-9.928 v1(-5.563,-10.411) ; U3.5 -4.826,11.29 v1(-4.826,11.709) ; J2.3 v1(-4.216,-10.363) ; U3.7 -3.226,11.29 v1(-3.226,11.709) ; v1(-2.794,-10.363) J2.5 ; v1(-2.438,8.433) -2.438,8.878 U3.1 ; v1@-1.092,-5.535 v1(-1.09,-5.537) ; v1(0.203,-8.611) 0.203,-8.13 C7.1 ; v1(0.356,-2.819) 0.359,-2.823 C14.1 ; v1(0.406,10.071) U4.8@0.406,11.232 ; C8.1 0.624,-8.971 0.624,-9.336 v1(0.635,-9.347) ; v1(3.404,-7.84) C9.1 ; C6.1 v1(4.445,-6.325) ; v1(4.089,-2.692) 4.596,-2.692 C5.1 ; C10.1 4.117,-7.899 v1(4.597,-7.899) ; v1@5.191,-2.143 C4.1 ; C3.1 v1(6.35,-1.813) ; Q1.3 6.657,2.515 v1(6.921,2.515) ; v1(9.931,5.08) R1.1
  Top Layer 1 w0.445: J1.5 v1(9.707,1.3)
  other v1: 5.182,-2.134 0.991,12.04 1.346,12.04 0.991,12.344 1.346,12.344
  other v2: -6.096,-3.81 -5.08,-3.81 -4.064,-3.81 -6.604,-3.302 -3.556,-3.302 -6.604,-2.54 -3.556,-2.54 -6.604,-1.778 -3.556,-1.778 -6.604,-1.016 -3.556,-1.016 -6.604,-0.254 -3.556,-0.254 -6.604,0.508 -3.556,0.508 -6.604,1.27 -3.556,1.27 -6.604,2.032 -3.556,2.032 -6.604,2.794 -3.556,2.794 -6.604,3.556 -3.556,3.556 -6.096,4.064 -5.08,4.064 -4.064,4.064
  other v3: 1.609,-6.359 2.049,-6.359
  other v4: 1.27,-1.27 2.54,-1.27 3.81,-1.27 1.27,0 2.54,0 3.81,0 1.27,1.27 2.54,1.27 3.81,1.27
I2C_SCK: R4.2 U1.92 U2.D2 U3.4 U4.6 | length 30.8
  Top Layer 1 w0.152: R4.2 -6.164,9.654 -6.164,9.636 -5.783,9.254 -5.203,9.254 U3.4 -4.832,6.61 -4.572,6.35 -1.778,6.35 -1.068,5.64 v3@-1.068,0.812 ; U1.92@-2.128,0.508 -1.374,0.508 v3(-1.069,0.813) ; v3(-1.27,7.624) -1.11,7.785 -1.11,11.844 -0.857,12.097 U4.6 ; v3(0.182,-6.278) 0.187,-6.283 0.563,-6.283 0.639,-6.359 U2.D2
  Bottom Layer 1 w0.152: v3(-1.27,5.842) v3(-1.27,7.624) ; v3(-1.069,0.813) -1.069,-0.235 -1.118,-0.284 -1.118,-1.357 -1.109,-1.366 -1.109,-3.463 -0.254,-4.318 -0.254,-5.842 v3(0.182,-6.278)
I2C_SDA: R3.1 U1.90 U2.D3 U3.3 U4.7 | length 30
  Top Layer 1 w0.152: R3.1 -5.435,9.534 -4.327,9.534 -4.032,9.239 U3.3 -4.032,7.08 -3.81,6.858 -0.714,6.858 ; U1.90 v3(-1.524,0) -1.27,0 -0.714,0.556 -0.714,6.858 ; v3(-0.199,-6.659) -0.17,-6.688 0.156,-6.688 0.258,-6.79 1.16,-6.79 U2.D3 ; U4.7 -0.564,11.697 -0.714,11.547 -0.714,6.858
  Bottom Layer 1 w0.152: v3(-1.524,0) -1.524,-3.81 -0.635,-4.699 -0.635,-6.223 v3(-0.199,-6.659)
NetBT1_2: BT1.2 C7.2 C8.2 L1.1 U2.C4 | length 31.7
  Top Layer 1 w0.254: 1.609,-7.564 U2.C4
  Top Layer 1 w0.381: C7.2 1.065,-8.108 1.609,-7.564
  Bottom Layer 1 w0.381: BT1.2@2.33,10.985 6.668,10.985 7.671,9.982 7.671,-9.825 6.574,-10.922 v1(3.073,-10.922)
  other v1: 2.54,-10.922 2.007,-10.897
NetBZ1_2: BZ1.2 D4.2 Q1.2
NetC3_2: C3.2 D1.5 FB1.1 J1.1 | length 4.1
  Top Layer 1 w0.381: v1(6.883,-1.321) 8.691,-1.321 J1.1
  Bottom Layer 1 w0.381: v1(5.055,-0.356) 5.664,-0.356 6.629,-1.321 v1(6.883,-1.321)
NetC9_2: C9.2 C10.2 U2.A3 | length 1
  Top Layer 1 w0.254: U2.A3 2.811,-6.799 2.972,-6.96 3.388,-6.96 C9.2
NetD2_2: D2.2 U4.4 | length 11.9
  Top Layer 1 w0.152: U4.4 4.521,12.497 5.588,11.43 8.636,11.43 11.271,8.795 D2.2
NetD2_3: D2.3 U4.3 | length 13
  Top Layer 1 w0.152: U4.3 4.159,12.097 5.334,10.922 8.382,10.922 10.668,8.636 v1(10.668,8.382) ; D2.3 11.684,7.379 v1(11.684,8.382)
  Bottom Layer 1 w0.152: v1(10.668,8.382) v1(11.684,8.382)
NetD2_4: D2.4 U4.2 | length 11.8
  Top Layer 1 w0.152: U4.2 3.797,11.697 5.08,10.414 8.128,10.414 v1(9.398,9.144) ; v1(9.423,6.985) 10.452,6.985 D2.4
  Bottom Layer 1 w0.152: v1(9.398,9.144) 9.411,9.131 9.411,6.998 v1(9.423,6.985)
NetD3_1: D3.1 U2.C3 | length 9.2
  Top Layer 1 w0.203: v1(6.985,-6.121) 9.335,-6.121 D3.1 D3.1@10.084,-5.372
  Bottom Layer 1 w0.203: v3(1.609,-6.799) 6.335,-6.799 6.985,-6.149 v1(6.985,-6.121)
NetD3_2: D3.2 R6.1 | length 8.8
  Top Layer 1 w0.152: R6.1 4.597,-5.715 5.611,-6.729 10.327,-6.729 D3.2
NetJ1_11: J1.11 R1.2 | length 1.7
  Top Layer 1 w0.381: J1.11@11.347,3.4 J1.11
  Top Layer 1 w0.457: J1.11@11.347,3.4 R1.2
NetL1_2: L1.2 U2.B4 | length 4.4
  Top Layer 1 w0.203: U2.B4 2.161,-7.35 2.161,-7.596 2.354,-7.79
  Top Layer 1 w0.229: U2.B4 U2.B4@2.063,-7.239
  Top Layer 1 w0.254: 2.354,-7.79 2.824,-8.259 3.366,-8.259 4.032,-8.925 4.431,-9.324 L1.2
  Top Layer 1 w0.381: L1.2@3.919,-9.038 L1.2
NetQ1_1: Q1.1 R7.2
NetR2_2: R2.2 U3.2 | length 2.1
  Top Layer 1 w0.152: U3.2 -2.718,9.398 -2.016,9.398 R2.2
NetR5_2: R5.2 U4.1 | length 0.9
  Top Layer 1 w0.152: U4.1 1.931,11.3 2.851,11.3 R5.2
NetSW1_A1: SW1.A1 SW1.A2 U2.D4 | length 10.9
  Top Layer 1 w0.152: SW1.A1 -1.88,-11.92 -1.88,-11.151 -1.52,-10.791 -0.728,-10.791 -0.33,-10.393 -0.33,-7.569 0,-7.239 U2.D4
  Top Layer 1 w0.254: SW1.A1 SW1.A2
NetU1_24: U1.24 U1.26 | length 0.5
  Top Layer 1 w0.254: U1.26@-7.527,2.515 U1.24@-7.527,2.997
NetU1_30: U1.30 U1.32 | length 0.5
  Top Layer 1 w0.254: U1.32@-7.527,1.016 U1.30@-7.527,1.499
NetU1_34: U1.34 U1.36 | length 0.5
  Top Layer 1 w0.254: U1.36@-7.527,-0.025 U1.34@-7.527,0.457
NetU1_44: U1.44 U1.46 | length 0.6
  Top Layer 1 w0.203: U1.46@-7.55,-2.5 U1.46@-7.502,-2.452
  Top Layer 1 w0.254: U1.46@-7.527,-2.489 U1.44@-7.527,-2.007
nRST: J2.6 U1.66 | length 3.9
  Top Layer 1 w0.152: U1.66 -4.1,-6.67 J2.6
SPI_CIPO: U1.82 U5.B2 | length 1.7
  Top Layer 1 w0.152: U1.82 -0.561,-2 -0.441,-1.88 U5.B2
SPI_COPI: U1.86 U5.D1 | length 2.3
  Top Layer 1 w0.152: U1.86 -1.329,-1 -1.04,-0.711 -0.352,-0.711 -0.036,-1.027 -0.036,-1.078 U5.D1@-0.035,-1.08
SPI_CS: U1.80 U5.A2 | length 1.7
  Top Layer 1 w0.152: U1.80 -0.646,-2.5 U5.A2
SPI_RST: U1.78 U5.B1 | length 5.9
  Top Layer 1 w0.152: U1.78 -0.837,-3 -0.616,-3.221 1.118,-3.221 1.262,-3.077 1.262,-2.029 1.113,-1.88 U5.B1
SPI_SCK: U1.88 U5.C1 | length 3.4
  Top Layer 1 w0.152: U1.88 -1.313,-0.5 -1.245,-0.432 -0.169,-0.432 0.305,-0.906 0.305,-1.39 0.216,-1.48 U5.C1
SPI_WP: U1.84 U5.C2 | length 1.6
  Top Layer 1 w0.152: U1.84 -2.04,-1.49 -1.25,-1.49 -1.241,-1.499 -0.46,-1.499 -0.441,-1.48 U5.C2
SWDCLK: J2.10 U1.64 | length 6
  Top Layer 1 w0.152: J2.10 -6.706,-9.144 -5.715,-9.144 -5.372,-8.801 -5.372,-8.287 -5.022,-7.938 -5.017,-7.938 -4.6,-7.521 U1.64
SWDIO: J2.9 U1.62 | length 3.5
  Top Layer 1 w0.152: J2.9 -5.1,-7.589 U1.62
SWO: J2.8 U1.94 | length 21.2
  Top Layer 1 w0.152: J2.8 -4.775,-8.584 -4.191,-9.168 v1(-4.191,-9.195)
  Top Layer 1 w0.254: U1.94@-2.007,1.016 v1(-1.598,1.016)
  Bottom Layer 1 w0.152: v1(-4.191,-9.195) -4.826,-9.83 -4.826,-10.414 -5.334,-10.922 -6.858,-10.922 -7.252,-10.528 -7.252,-7.9 -5.271,-5.918 -2.388,-5.918 -2.057,-5.588 -2.057,0.557 v1(-1.598,1.016)
USBD_N: D1.1 J1.2 | length 2.5
  Top Layer 1 w0.23: D1.1 7.053,-0.856 7.259,-0.65 J1.2
USBD_P: D1.3 J1.3 | length 2.5
  Top Layer 1 w0.23: D1.3 7.12,0.144 7.264,0 J1.3
VBUS: C2.2 C4.2 C5.2 FB1.2 U1.72 | length 6.1
  Top Layer 1 w0.305: C4.2 C4.2@5.601,-2.696
  Top Layer 1 w0.381: C2.2@-1.092,-4.496 v5(0.152,-4.496) ; v1(2.057,-4.496) 2.616,-4.496 3.558,-3.554 C5.2
  Bottom Layer 1 w0.381: v5(0.152,-4.496) v1(2.057,-4.496)
pads on no net: BZ1.3 J1.4 J1.6 J1.7 J1.8 J1.9 J1.10 J2.4 J2.7 U1.2 U1.4 U1.6 U1.8 U1.10 U1.12 U1.14 U1.18 U1.56 U1.57 U1.61 U1.65 U1.67 U1.69 U1.73 U1.74 U1.75 U1.77 U1.79 U1.108 U1.121 U1.122 U1.123 U1.124 U1.125 U1.126 U1.127 U1.128 U1.129 U1.130 U1.131 U1.132 U1.133 U1.134 U1.135 U1.136 U1.137 U1.138 U1.139 U1.140 U1.141 U1.142 U1.143 U1.144 U1.145 U1.146 U1.147 U1.148 U1.149 U1.150 U1.151 U1.152 U1.153 U1.154 U1.155 U1.156 U1.157 U2.A1 U2.B3 U2.C1 U2.D1

## Polygon pours and split planes (outlines as drawn)
GND on Top Layer 1 "GND_L01_P049" (solid, pour order 49): -6.045,-5.029 -6.045,-5.08 -6.071,-5.105 -6.248,-5.105 -6.274,-5.131 -6.274,-6.198 -6.325,-6.248 -6.325,-6.579 -6.299,-6.604 -5.969,-6.604 -5.944,-6.579 -5.944,-5.156 -5.867,-5.08 -5.664,-5.08 -5.639,-5.055 -5.639,-4.394 -5.74,-4.394 -5.766,-4.42 -5.842,-4.343 -6.045,-4.343
GND on Top Layer 1 "GND_L01_P048" (solid, pour order 48): -7.899,-2.845 -7.874,-2.819 -7.239,-2.819 -7.239,-4.242 -7.036,-4.445 -6.985,-4.445 -7.036,-4.496 -7.036,-5.715 -7.899,-5.715 -7.899,-5.69 -7.899,-4.496
GND on Top Layer 1 "GND_L01_P047" (solid, pour order 47): -7.264,4.445 -7.239,4.47 -6.655,5.055 -3.048,5.055 -2.438,4.445 -2.438,-2.464 -3.124,-2.464 -3.15,-2.489 -3.15,-4.318 -3.2,-4.369 -4.572,-4.369 -4.623,-4.42 -4.623,-5.029 -4.648,-5.055 -5.004,-5.055 -5.029,-5.029 -5.029,-4.42 -5.08,-4.369 -5.613,-4.369 -5.639,-4.394 -5.639,-5.004 -5.664,-5.029 -5.994,-5.029 -6.045,-4.978 -6.045,-4.381 -6.071,-4.369 -6.604,-4.369 -6.629,-4.394 -6.629,-4.445 -6.655,-4.47 -7.239,-4.47 -7.264,-4.445
VBUS on Top Layer 1 "VBUS_L01_P009" (solid, pour order 9): -0.94,-4.699 -1.27,-4.699 cw(c-1.27,-4.674) -1.295,-4.674 ccw(c-1.321,-4.674) -1.321,-4.648 -2.311,-4.648 cw(c-2.311,-4.623) -2.337,-4.623 -2.337,-4.369 cw(c-2.311,-4.369) -2.311,-4.343 -1.321,-4.343 ccw(c-1.321,-4.318) -1.295,-4.318 cw(c-1.27,-4.318) -1.27,-4.293 -0.94,-4.293 cw(c-0.94,-4.318) -0.914,-4.318 -0.914,-4.674 cw(c-0.94,-4.674)
GND on Top Layer 1 "GND_L01_P043" (solid, pour order 43): -2.616,-4.902 -2.591,-4.877 -1.436,-4.877 -1.41,-4.851 -0.94,-4.851 -0.914,-4.877 -0.914,-5.588 -1.016,-5.69 -1.168,-5.69 -1.27,-5.588 -1.676,-5.588 -1.803,-5.715 -2.591,-5.715 -2.616,-5.69
NetBT1_2 on Top Layer 1 "Top Layer 1-NetBT1_2" (solid, pour order 38): 0.762,-8.433 0.965,-8.636 0.965,-9.144 1.016,-9.195 1.321,-9.195 1.702,-9.576 1.702,-10.998 1.829,-11.125 3.2,-11.125 3.327,-10.998 3.327,-8.636 3.226,-8.534 2.515,-8.534 1.803,-7.823 1.803,-7.493 1.676,-7.214 1.651,-7.366 1.499,-7.391 1.067,-7.823 0.838,-7.823 0.762,-7.925
NetC3_2 on Top Layer 1 "Top Layer 1-NetC3_2" (solid, pour order 36): 6.529,-3.809 7.316,-3.809 7.442,-3.683 7.442,-2.108 7.976,-1.575 9.398,-1.575 9.398,-1.067 7.239,-1.067 6.706,-1.6 6.706,-2.464 6.655,-2.515 6.147,-2.515 6.071,-2.591 6.071,-3.759 6.121,-3.81 6.528,-3.81
VBUS on Top Layer 1 "VBUS_L01_P033" (solid, pour order 33): 5.41,-2.515 5.766,-2.515 5.766,-3.251 5.867,-3.353 5.867,-3.734 5.791,-3.81 4.318,-3.81 4.318,-3.302 5.359,-3.302 5.41,-3.251
NetBZ1_2 on Top Layer 1 "Top Layer 1-NetBZ1_2" (solid, pour order 31): 7.899,5.182 9.068,5.182 9.093,5.207 9.093,6.375 9.068,6.401 7.087,6.401 6.121,5.436 6.121,3.759 6.071,3.632 6.071,3.429 6.071,3.023 6.782,3.023 6.782,3.632 6.731,3.785 6.731,4.013
NetQ1_1 on Top Layer 1 "NETQ1_1_L01_P032" (solid, pour order 32): 5.309,2.692 5.994,2.692 6.045,2.743 6.299,2.743 6.325,2.718 6.325,2.311 6.299,2.286 6.045,2.286 5.994,2.337 5.309,2.337
3V on Top Layer 1 "3V_L01_P028" (solid, pour order 28): 3.401,6.452 5.382,6.452 5.992,5.842 5.992,4.572 5.992,3.912 5.357,3.912 3.401,5.055 3.376,5.08 3.299,5.156 3.299,6.35
NetC9_2 on Top Layer 1 "NETC9_2_L01_P023" (solid, pour order 23): 3.137,-6.756 4.381,-6.756 4.407,-6.782 4.407,-7.29 4.381,-7.315 3.848,-7.315 3.696,-7.163 2.984,-7.163 2.654,-6.833 2.654,-6.706 2.692,-6.68 2.921,-6.68
3V on Top Layer 1 "Top Layer 1-3V" (solid, pour order 22): 2.769,-6.452 2.794,-6.452 2.76,-6.486 3.141,-6.553 3.581,-6.553 3.607,-6.528 3.607,-5.537 3.581,-5.512 3.251,-5.512 3.2,-5.563 3.2,-5.817 2.769,-6.248
GND on GND1 "GND_L02_P045" (solid, pour order 45): -7.571,-12.366 ccw(c0,0) -4.813,-13.678 4.813,-13.678 ccw(c0,0) 13.068,-6.283 13.069,-6.282 13.069,6.282 ccw(c0,0) -7.571,12.366
GND on GND2 "GND_L03_P046" (solid, pour order 46): -7.591,-12.334 ccw(c-0.019,0.032) -4.832,-13.646 4.793,-13.646 ccw(c-0.019,0.032) 13.049,-6.25 13.049,6.314 ccw(c-0.019,0.032) -7.591,12.399

## Keep-outs
Keep-Out Layer:
  region: -7.874,-12.811 cw(c0,0) -7.867,12.816 -7.874,12.827

## Silkscreen, mask and mechanical layers (free items; w line width, h text height)
Top Overlay:
  drawing of 7 lines, arcs and shapes, not listed
Bottom Overlay:
  lines w0.254: -12.192,-7.366 -8.636,-7.366 ; -12.192,7.366 -8.636,7.366 ; -11.938,-8.128 -11.176,-7.366 -11.938,-6.604 ; -11.938,6.604 -11.176,7.366 -11.938,8.128 ; 9.144,5.588 8.382,6.35 ; 9.144,7.112 8.382,6.35 ; 9.398,-7.112 8.636,-6.35 ; 9.398,-5.588 8.636,-6.35 ; 11.43,6.35 8.382,6.35 ; 11.684,-6.35 8.636,-6.35
  text "@vksesham" at -9.933,4.064 h1.52 r90
  text "CR2032" at 11.4,3.81 h2.54 r90
Mechanical 1:
  the board outline again, w0.254
Top Assembly:
  lines w0.254: 5.067,-14.11 -5.135,-14.11 cw(c0,0) 13.608,6.346 ; 5.07,-14.117 ccw(c0,0) 13.594,-6.339

## Dimensions
13.594,-6.339 to 5.01,-14.139 on Top Component Center
13.594,6.339 to 0,15 on Top Component Center
0,0 to 15.507,-15.507 on Top Component Center
0,0 to -17.694,0 on Top Component Center
-5.01,-14.139 to 5.01,-14.139 on Top Component Center
13.595,6.339 to 13.595,-6.339 on Top Component Center

## Text inside footprints (layer, text, board x,y; h text height)
BT1: Bottom Overlay "+" at 2.125,-12.925 h1 r270; Bottom Overlay "+" at 2.125,12.35 h1 r270